# Altium PCB CH32V003F4P6_Dev_Kit_DIY_V1.0.PcbDoc
Units mil, origin at the board's own origin, x right, y up, seen from the top; angles counter-clockwise.
Board outline 1371.87 x 1190 mil, 2 copper layers (Top Layer, Bottom Layer), stack 22.441 mil thick; 16 components, 24 nets, 75 pads, 45 vias.
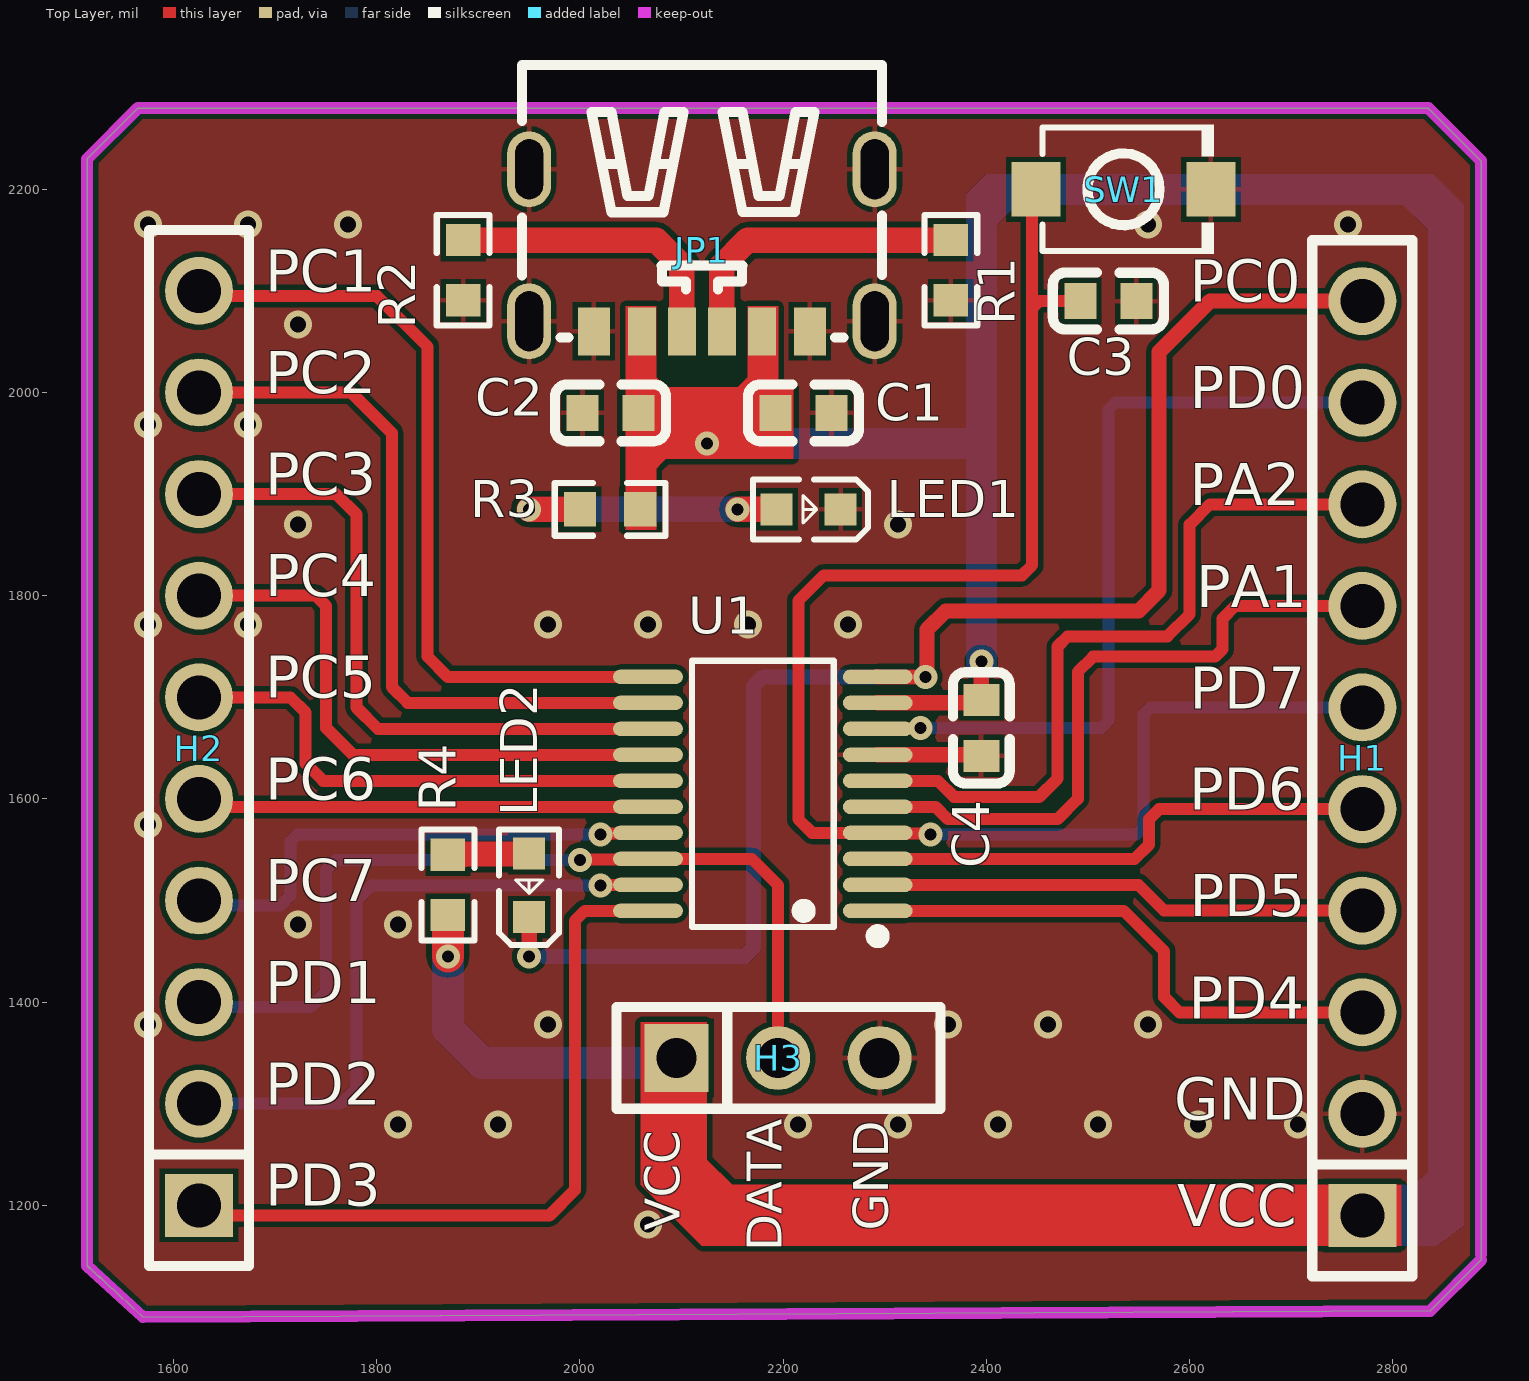
[diagram p0: Top Layer view]
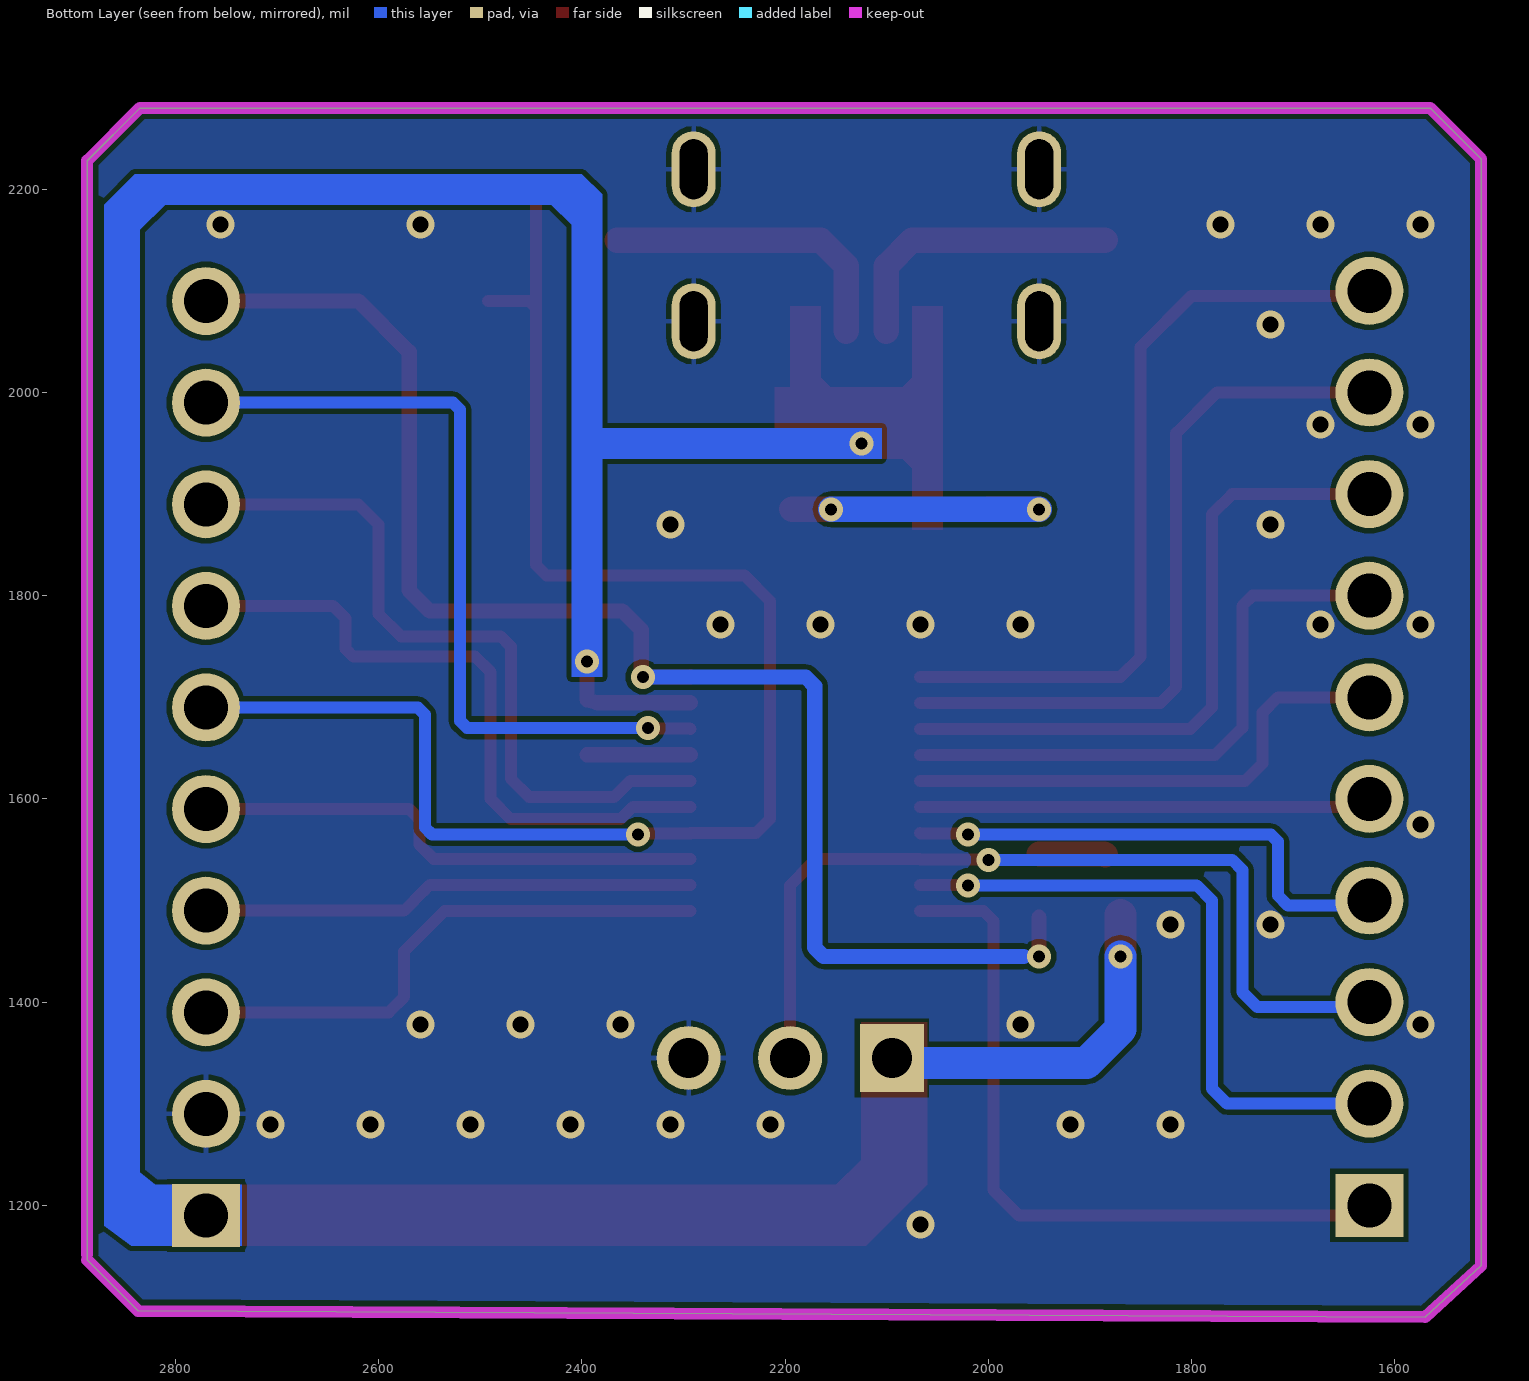
[diagram p1: Bottom Layer view, seen from below]
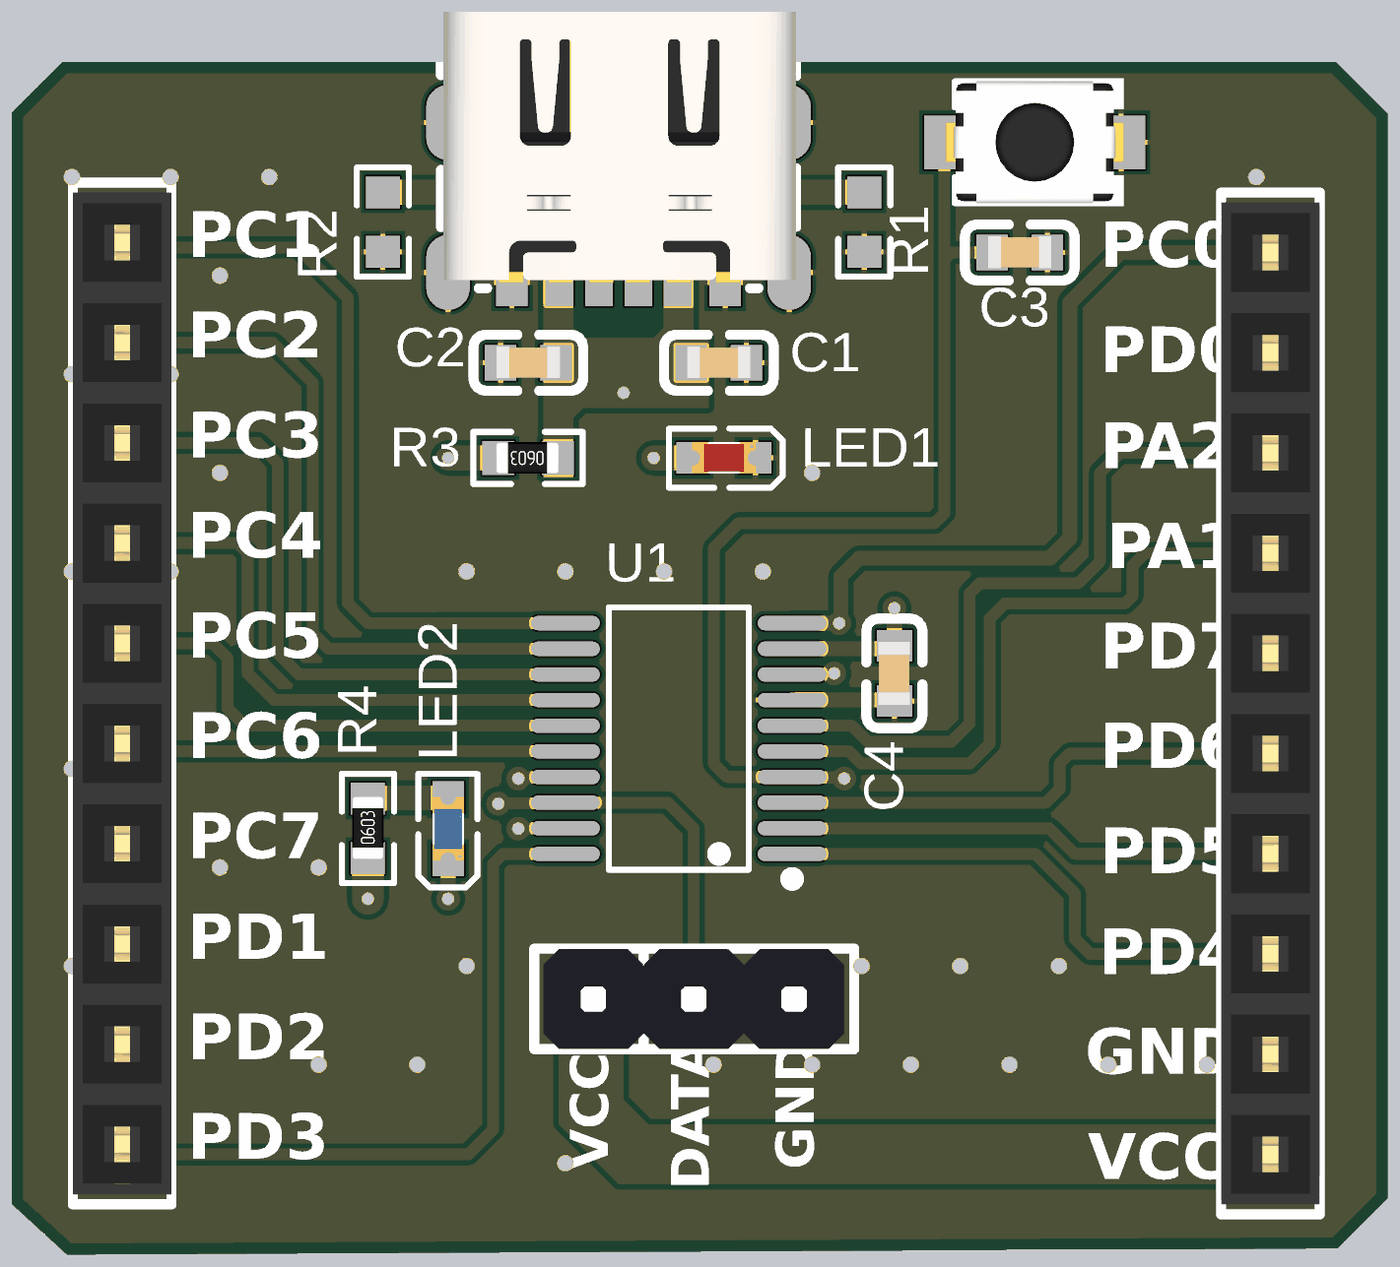
[diagram p2: 3D render of the assembled board from above, using the file's embedded part models]

## Layer stack, top to bottom
Top Solder: solder mask 0.5, Solder Resist, Dk 3.8
Top Layer: signal copper 1.378
Dielectric 1: core 19.685, FR-4, Dk 4.5
Bottom Layer: signal copper 1.378
Bottom Solder: solder mask 0.5, Solder Resist, Dk 3.8

## Board outline
1515,1140.45 1515,2230 1565,2280 2835,2280 2886.87,2228.13 2886.87,1146.19 2836.87,1096.19 1570,1090

## Design rules (kind name [scope] priority, off if disabled: settings)
BoardOutlineClearance [All] p1: gap=7.87 ignorepadtopadclearanceinfootprint=FALSE
Clearance [All] p1: gap=5 ignorepadtopadclearanceinfootprint=FALSE except(9.84: Arc-Hole Track-Hole SMDPad-Hole THPad-Hole Via-Hole Fill-Hole Poly-Hole Region-Hole Text-Hole)
ComponentClearance [All] p1: gap=5 collisioncheckmode=3 verticalgap=5 showdistances=TRUE
DiffPairsRouting [All] p1: maxlimit=10 minlimit=5 mostfreqgap=5 toplayer_minwidth=5 toplayer_maxwidth=1000 toplayer_prefwidth=5 bottomlayer_minwidth=5 bottomlayer_maxwidth=1000 bottomlayer_prefwidth=5 maxuncoupledlength=500
Height [All] p1: minheight=0 maxheight=71497.94 prefheight=500
HoleSize [All] p1: absolutevalues=TRUE maxlimit=248.03 minlimit=11.81 maxpercent=80.000 minpercent=20.000
HoleToHoleClearance [All] p1: gap=9.84 allowstackedmicrovias=FALSE
MinimumAnnularRing [All] p1: minimumring=3
MinimumSolderMaskSliver [All] p1: minsoldermaskwidth=0
PlaneClearance [All] p1: clearance=5
PlaneConnect PlaneConnectPowerPads [InPadClass('PowerPads')] p1: planeconnectstyle=Direct reliefexpansion=20 reliefentries=4 reliefconductorwidth=10 reliefairgap=10
PlaneConnect [All] p2: pad.planeconnectstyle=Relief pad.reliefexpansion=11.81 pad.reliefentries=4 pad.reliefconductorwidth=5 pad.reliefairgap=5 via.planeconnectstyle=Direct via.reliefexpansion=11.81 via.reliefentries=4 via.reliefconductorwidth=5 via.reliefairgap=5
PolygonConnect PolygonConnectPowerPads [All vs (InPadClass('PowerPads'))] p1: connectstyle=Direct reliefconductorwidth=10 reliefentries=4 polygonreliefangle="90 Angle" airgapwidth=10
PolygonConnect [All] p2: thpad.connectstyle=Relief thpad.reliefconductorwidth=5 thpad.reliefentries=4 thpad.polygonreliefangle="90 Angle" thpad.airgapwidth=5 smdpad.connectstyle=Relief smdpad.reliefconductorwidth=5 smdpad.reliefentries=4 smdpad.polygonreliefangle="90 Angle" smdpad.airgapwidth=5 via.connectstyle=Direct via.reliefconductorwidth=5 via.reliefentries=4 via.polygonreliefangle="90 Angle" via.airgapwidth=5
RoutingVias [All] p1: holewidth=11.81 width=23.62 viastyle="Through Hole" minholewidth=11.81 minwidth=23.62 maxholewidth=23.62 maxwidth=259.84
SilkToSilkClearance [All] p1: silktosilkclearance=0
SilkToSolderMaskClearance [IsPad] p1: minsilkscreentomaskgap=5 clearancetoexposedcopper=TRUE
SolderMaskExpansion [All] p1: expansion=2.95 istentingtop=FALSE
Width [All] p1: maxlimit=1000 minlimit=5 preferedwidth=5 minimp=50.000000 maximp=50.000000 favimp=50.000000
20 further rules are at their usual default settings.

## Components (designator, comment, footprint, x,y, rotation, side; value= is the part's Value field where it differs from the comment)
C1 "10uF" C0603 2220,1980 r0 top
C2 "10uF" C0603 2030,1980 r0 top
C3 "10uF" C0603 2520,2090 r0 top
C4 "10uF" C0603 2395,1670 r90 top
H1 "10P 2.54mm Female Header" "10P, 2,54mm, FEMALE HEADER" 2770,1640 r90 top
H2 "10P 2.54mm Female Header" "10P, 2,54mm, FEMALE HEADER" 1625,1650 r90 top
H3 "3P_2.54mm_Male_Header" 3P_2.54mm_Male_Header 2095,1345 r90 top
JP1 "TYPE_C_6P" TYPE_C_6P 2120,2140 r180 top
LED1 "Red" LED0603_RED 2225,1885 r0 top
LED2 "Blue" LED0603_BLUE 1950,1515 r270 top
R1 "5.1K" "R0603 - NC" 2391.01,2065.81 r90 top
R2 "5.1K" "R0603 - NC" 1911.01,2065.81 r90 top
R3 "330Ω" R0603 2084.19,1911.01 r180 top
R4 "330Ω" R0603 1896.01,1460.81 r90 top
SW1 "SMD 3mm×4mm" "ROUND_BUTTON_SMD 3*4mm" 2535,2200 r0 top
U1 "CH32V003F4P6" TSSOP-20 2180,1605 r90 top

## Footprints (in the part's own frame and the unit in brackets; to place one, negate y for a bottom-side part, rotate by r counter-clockwise, add the part's x,y. Pads: shape width x height; smd on the part's side, far side on the other; paste and mask are expansions set on the pad)
3P_2.54mm_Male_Header [mm]
  rect 1.7x1.6 hole 1 paste-2539.97 mask+0.051: 1(0,0)
  round 1.6 hole 1 paste-2539.97 mask+0.051: 2(0,-2.54) 3(0,-5.08)
  silkscreen extent -1.27,-6.6 1.28,1.5, body extent -1.27,-6.35 1.27,1.27, height 8.34
"10P, 2,54mm, FEMALE HEADER" [mm]
  rect 1.575x1.7 hole 1.1 paste-2539.97 mask+0.051: 1(-11.43,0)
  round 1.7 hole 1.1 paste-2539.97 mask+0.051: 2(-8.89,0) 3(-6.35,0) 4(-3.81,0) 5(-1.27,0) 6(1.27,0) 7(3.81,0) 8(6.35,0) 9(8.89,0) 10(11.43,0)
  silkscreen extent -12.95,-1.25 12.95,1.25, body extent -12.7,-1.25 12.7,1.25, height 8.5
C0603 [mm]
  rect 0.8x0.9 smd paste+0 mask+0.051: 1(-0.7,0) 2(0.7,0)
  silkscreen extent -1.39,-0.71 1.39,0.71, body extent -0.8,-0.39 0.8,0.41, height 0.8
LED0603_BLUE [mm]
  rect 0.8x0.8 smd paste+0 mask+0.051: 1(-0.799,0) 2(0.799,0)
  silkscreen extent -1.39,-0.76 1.49,0.75, body extent -0.8,-0.4 0.8,0.4, height 0.6
LED0603_RED [mm]
  rect 0.8x0.8 smd paste+0 mask+0.051: 1(-0.799,0) 2(0.799,0)
  silkscreen extent -1.39,-0.76 1.49,0.75, body extent -0.8,-0.4 0.8,0.4, height 0.6
R0603 [mil]
  rect 31.75x34.02 smd paste+0 mask+2: 1(24.88,26.01) 2(84.19,26.01)
  silkscreen extent 0,0 109,52, body extent 24,10 86,42, height 18
"R0603 - NC" [mil]
  rect 31.75x34.02 smd paste+0 mask+2: 1(24.88,26.01) 2(84.19,26.01)
  silkscreen extent 0,0 109,52
"ROUND_BUTTON_SMD 3*4mm" [mm]
  rect 1.23x1.36 smd paste+0 mask+0.051: 1(-2.185,0) 2(2.185,0)
  silkscreen extent -2.03,-1.62 2.25,1.62, body extent -2.25,-1.55 2.25,1.55, height 2.05
TSSOP-20 [mm]
  oval 0.364x1.742 smd paste+0 mask+0.051: 1(-2.925,-2.871) 2(-2.275,-2.871) 3(-1.625,-2.871) 4(-0.975,-2.871) 5(-0.325,-2.871) 6(0.325,-2.871) 7(0.975,-2.871) 8(1.625,-2.871) 9(2.275,-2.871) 10(2.925,-2.871) 11(2.925,2.871) 12(2.275,2.871) 13(1.625,2.871) 14(0.975,2.871) 15(0.325,2.871) 16(-0.325,2.871) 17(-0.975,2.871) 18(-1.625,2.871) 19(-2.275,2.871) 20(-2.925,2.871)
  silkscreen extent -3.71,-3.02 3.33,1.77, body extent -3.23,-3.25 3.27,3.17, height 1.29
TYPE_C_6P [mm]
  oval 1.1x1.9 hole 0.7 slot 1.5 at 90 deg paste-2539.97 mask+0.051: 7(-4.32,-2.025) 7(-4.32,1.775) 7(4.32,-2.025) 7(4.32,1.775)
  rect 0.7x1.2 smd mask+0.051: A5(-0.5,2.025) A9(1.5,2.025) B5(0.5,2.025) B9(-1.5,2.025)
  rect 0.8x1.2 smd mask+0.051: A12(2.7,2.025) B12(-2.7,2.025)
  silkscreen extent -4.5,-4.63 4.5,2.17, body extent -4.5,-4.84 4.44,2.03, height 3.26

## Part data
C1 C2 C3 C4: library part C0603_MLCC_10uF_X5R_25V, "25V 10uF X5R ±20% 0603 Multilayer Ceramic Capacitors MLCC - SMD/SMT ROHS", LCSC Part=C596327, Manufacturer=YAGEO, Mfr. Part=CC0603MRX5R8BB106, Package=0603, Temperature Coefficient="X5R, 25V", Tolerance=±20%, Voltage Rating=25V, Capacitance=10uF, Link=https://www.lcsc.com/product-detail/C596327.html
H1 H2: "2.54mm 1 8P Through Hole 1x8P Through Hole,P=2.54mm Female Headers ROHS", LCSC Part=C5116489, Manufacturer=ZHOURI, Mfr. Part=PM2.54-1*10, Package="Through Hole,P=2.54mm", Holes Structure=1x10P, Link=https://www.lcsc.com/product-detail/C5116489.html, Pitch=2.54mm
H3: "250V 3A Through Hole Pin Header 2.5mm 3P 6mm -40℃~+105℃ 3mm 2.54mm 1 Black 1x3P Through Hole,P=2.54mm Pin Headers ROHS", Current Rating=3A, LCSC Part=C2937625, Manufacturer=XFCN, Mfr. Part=PZ254V-11-03P, Package="Through Hole,P=2.54mm", Voltage Rating (Max)=250V, Link=https://www.lcsc.com/product-detail/C2937625.html, Number of Pins=3P
JP1: "3A USB 3.1 1 Surface Mount, Right Angle 6P Female -40℃~+85℃ Type-C SMD USB Connectors ROHS", Current Rating-Power=3A, LCSC Part=C456012, Manufacturer="SHOU HAN", Mfr. Part="TYPE-C 6P", Package=SMD, Voltage Rating=5V, Key Attributes="CONN RCPT USB 3.1 Type-C 6POS SMD R/A", Link=https://www.lcsc.com/product-detail/C456012.html?s_z=n_typec%25206p, Number of Contacts=6P, Protocol Standard="USB 3.1"
LED1: library part LED0603_Red, "20mA 230mcd Water Clear -40℃~+85℃ 630nm Red 120° 75mW 1.95V 0603 LED Indication - Discrete ROHS", Forward Current=20mA, LCSC Part=C5875723, Manufacturer=Kingbright, Mfr. Part=APT1608SURCK, Operating Temperature=-40℃~+85℃, Package=0603, Power(Watts)=75mW, Voltage - Forward(Vf)=1.95V, Illumination Color=Red, Key Attributes="1.6 x 0.8 mm SMD Chip LED Lamp", Link=https://www.lcsc.com/product-detail/C5875723.html
LED2: library part LED0603_Blue, "2mA 24mcd Water Clear -40℃~+85℃ 470nm Blue 130° 120mW 2.65V 0603 LED Indication - Discrete ROHS", Forward Current=2mA, LCSC Part=C5200747, Manufacturer=Kingbright, Mfr. Part=APT1608LVBC/D, Operating Temperature=-40℃~+85℃, Package=0603, Power(Watts)=120mW, Voltage - Forward(Vf)=2.65V, Illumination Color=Blue, Key Attributes="1.6 x 0.8 mm SMD Chip LED Lamp", Link=https://www.lcsc.com/product-detail/C5200747.html
R1 R2: library part R0603_NC, Package=0603, Status=NC
R3 R4: library part R0603_330Ω_±1%, "100mW Thick Film Resistor 75V ±100ppm/℃ ±1% 330Ω 0603 Chip Resistor - Surface Mount ROHS", LCSC Part=C105881, Manufacturer=YAGEO, Mfr. Part=RC0603FR-07330RL, Operating Temperature=-55℃~+155℃, Package=0603, Tolerance=±1%, Link=https://www.lcsc.com/product-detail/C105881.html, Resistance=330Ω
SW1: library part SW_BUTTON_SMD_3mm×4mm, "Without Bracket 50mA 4mm 100,000 Cycles 12V 1.6N 3mm 2mm Round Button Surface Mount,Vertical SPST SMD Tactile Switches ROHS", LCSC Part=C720477, Manufacturer=XUNPU, Mfr. Part=TS-1088-AR02016, Operating Temperature=-30℃~+80℃, Package=SMD, Voltage Rating=12V, Length=4mm, Link=https://www.lcsc.com/product-detail/C720477.html?s_z=n_Button, Width=3mm
U1: library part CH32V003F4P6_TSSOP-20-175mil, "TSSOP-20-175mil Microcontrollers (MCU/MPU/SOC) ROHS", LCSC Part=C5187096, Manufacturer=WCH, Package=TSSOP-20-175mil, Link=https://www.lcsc.com/product-detail/C5187096.html?s_z=n_CH32V003F4P6, Mfr. Part=CH32V003F4P6

## Via types
v1: diameter 27.56, hole 15.75, Top Layer to Bottom Layer, tented both sides, 33 vias
v2: diameter 23.62, hole 11.81, Top Layer to Bottom Layer, tented both sides, 12 vias

## Nets (pads, with @x,y where several pads share a name; then routed paths per layer and width w, separated by ;. In a path a pad name is that pad's centre, name@x,y a point inside that pad or via, vN(x,y) a via of type N, cw(c..) or ccw(c..) an arc to the next point about the centre after c; other vN are vias at no path point)
GND: C1.2 C2.1 C3.2 C4.1 H1.2 H3.3 JP1.7 JP1.A12 JP1.B12 LED1.2 R1.1 R2.1 SW1.2 U1.7 | length 102
  Top Layer w15: U1.7 C4.1@2395,1643.39
  other v1: 2066.93,1181.1 1820.87,1279.53 1919.29,1279.53 2214.57,1279.53 2312.99,1279.53 2411.42,1279.53 2509.84,1279.53 2608.27,1279.53 2706.69,1279.53 1574.8,1377.95 1968.5,1377.95 2362.2,1377.95 2460.63,1377.95 2559.06,1377.95 1722.44,1476.38 1820.87,1476.38 1574.8,1574.8 1574.8,1771.65 1673.23,1771.65 1968.5,1771.65 2066.93,1771.65 2165.35,1771.65 2263.78,1771.65 1722.44,1870.08 2312.99,1870.08 1574.8,1968.5 1673.23,1968.5 1722.44,2066.93 1574.8,2165.35 1673.23,2165.35 1771.65,2165.35 2559.06,2165.35 2755.91,2165.35
NetJP1_A5: JP1.A5 R1.2 | length 300.2
  Top Layer w25: JP1.A5 2139.68,2124.68 2165,2150 R1.2
NetJP1_B5: JP1.B5 R2.2 | length 290.2
  Top Layer w25: R2.2 2075,2150 2100.31,2124.69 JP1.B5
NetLED1_1: LED1.1 R3.2 | length 293.5
  Top Layer w25: v2(1950,1885) R3.2 ; v2(2155,1885) LED1.1
  Bottom Layer w25: v2(1950,1885) v2(2155,1885)
NetLED2_1: LED2.1 R4.2 | length 65.3
  Top Layer w25: R4.2@1885,1545 1885.74,1545.74 LED2.1@1950,1545.74
PA1: H1.7 U1.5 | length 659.8
  Top Layer w11.81: U1.5 2349.92,1592.2 2362.13,1580 2470,1580 2490,1600 2490,1725 2505,1740 2625,1740 2632.5,1747.5 2632.5,1777.5 2645,1790 H1.7
PA2: H1.8 U1.6 | length 730.7
  Top Layer w11.81: U1.6 2352.2,1617.8 2368.19,1601.81 2451.81,1601.81 2470,1620 2470,1750 2480,1760 2578.08,1760 2600,1781.92 2600,1870 2620,1890 H1.8
PC0: H1.10 LED2.2 U1.10 | length 1472.5
  Top Layer w15: v2(1950,1445) LED2.2 ; U1.10 2293.11,1720.08 2339.92,1720.08 v2(2340,1720) 2341.65,1721.65 2341.65,1766.65 2360,1785 2550,1785 2570,1805 2570,2040 2620,2090 H1.10
  Bottom Layer w15: 1965,1445 2162.11,1445 2170.9,1453.79 2170.9,1711.21 2179.69,1720 v2(2340,1720)
PC1: H2.10 U1.11 | length 778.1
  Top Layer w11.81: H2.10 1630,2095 1800,2095 1850,2045 1850,1740 1870,1720 1939.69,1720 1939.84,1720.16 U1.11
PC2: H2.9 U1.12 | length 714.9
  Top Layer w11.81: H2.9 1775,2000 1815,1960 1815,1710 1830.43,1694.57 U1.12
PC3: H2.8 U1.13 | length 649
  Top Layer w11.81: H2.8 1760,1900 1780,1880 1780,1690 1801.02,1668.98 U1.13
PC4: H2.7 U1.14 | length 577.1
  Top Layer w11.81: H2.7 1740,1800 1750,1790 1750,1670 1776.61,1643.39 U1.14
PC5: H2.6 U1.15 | length 505.3
  Top Layer w11.81: H2.6 1715,1700 1730,1685 1730,1635 1747.21,1617.8 U1.15
PC6: H2.5 U1.16 | length 445.2
  Top Layer w11.81: H2.5 1632.8,1592.2 U1.16
PC7: H2.4 U1.17 | length 504.8
  Top Layer w11.81: v2(2020,1565) 2021.13,1566.13 2066.49,1566.13 U1.17
  Bottom Layer w11.81: H2.4 1630,1495 1705,1495 1715,1505 1715,1558.08 1721.92,1565 v2(2020,1565)
PD0: H1.9 U1.8 | length 789.3
  Top Layer w11.81: U1.8 2293.51,1669.46 2334.46,1669.46 v2(2335,1670)
  Bottom Layer w11.81: v2(2335,1670) 2513.08,1670 2520,1676.92 2520,1983.08 2526.92,1990 H1.9
PD1: H2.3 H3.2 U1.18 | length 883.6
  Top Layer w11.81: v2(2000,1540) 2000.54,1540.54 2066.49,1540.54 U1.18 2168.98,1541.02 2174.97,1535.03 2195,1515 H3.2
  Bottom Layer w11.81: H2.3 1630,1395 1735,1395 1750,1410 1750,1530 1760,1540 v2(2000,1540)
PD2: H2.2 U1.19 | length 639.6
  Top Layer w11.81: v2(2020,1515) 2020.43,1515.43 U1.19
  Bottom Layer w11.81: H2.2 1765,1300 1780,1315 1780,1500 1795,1515 v2(2020,1515)
PD3: H2.1 U1.20 | length 725.5
  Top Layer w11.81: H2.1 1635,1190 1970,1190 1995,1215 1995,1480 2004.84,1489.84 U1.20
PD4: H1.3 U1.1 | length 544.7
  Top Layer w11.81: U1.1 2535.16,1489.84 2575,1450 2575,1405 2590,1390 H1.3
PD5: H1.4 U1.2 | length 487.5
  Top Layer w11.81: U1.2 2549.57,1515.43 2554.97,1510.03 2575,1490 H1.4
PD6: H1.5 U1.3 | length 511.9
  Top Layer w11.81: U1.3 2546.02,1541.02 2560,1555 2560,1580 2570,1590 H1.5
PD7: C3.1 H1.6 SW1.1 U1.4 | length 1559.4
  Top Layer w11.81: U1.4@2293.03,1566.13 2343.87,1566.13 v2(2345,1565) ; U1.4 2228.39,1566.61 2215,1580 2215,1795 2240,1820 2435,1820 2445,1830 2445,2083.08 ; SW1.1 2445,2196.02 2445,2083.08 ; C3.1 2451.92,2090 2445,2083.08
  Bottom Layer w11.81: v2(2345,1565) 2547.58,1565 2554.5,1571.92 2554.5,1683.08 2561.42,1690 H1.6
VCC: C1.1 C2.2 C4.2 H1.1 H3.1 JP1.A9 JP1.B9 R3.1 R4.1 U1.9 | length 2817.2
  Top Layer w15: C2.2 2116.21,1980 2125,1971.21 v2(2125,1950) ; U1.9 2384.78,1694.57 C4.2 v2(2395,1735)
  Top Layer w31.5: v2(1870,1445) R4.1
  Bottom Layer w15: v2(2125,1950) 2126.11,1951.11 2395,1951.11 ; v2(2395,1735) 2395,1951.11 ; H1.1 2835,1190 2855,1210 2855,2155 2810,2200 2430,2200 2395,2165 2395,1951.11
  Bottom Layer w31.5: v2(1870,1445) 1870,1373.45 1903.45,1340 2090,1340 H3.1

## Polygon pours and split planes (outlines as drawn)
GND on Top Layer "GND_L01_P000" (solid, remove dead copper, pour order 0): 1515,1140.45 1515,2230 1565,2280 2835,2280 2886.87,2228.13 2886.87,1146.19 2836.87,1096.19 1570,1090
GND on Bottom Layer "GND_L02_P001" (solid, remove dead copper, pour order 1): 1515,1140.45 1515,2230 1565,2280 2835,2280 2886.87,2228.13 2886.87,1146.19 2836.87,1096.19 1570,1090

## Keep-outs
Keep-Out Layer:
  lines w11.81: 1515,2219.47 1515,1140.45 1570,1090 2836.87,1096.19 2886.87,1146.19 ; 1515,2220 1515,2230 1565,2280 2835,2280 2886.87,2228.13 2886.87,1151.72

## Other copper
Top Layer:
  region net VCC: 2060,1380 2060,1220 2120,1160 2808.15,1160 2808.15,1220 2150,1220 2125,1245 2125,1380
  region net VCC: 2090,1940 2065,1915 2065,1950
  region net VCC: 2045,1935 2045,1865 2075,1865 2075,1935
  region net VCC: 2140,1990 2165,2015 2170,2010 2170,1975 2165,1970
  region net VCC: 2075,2015 2100,1990 2095,1985 2060,1985 2055,1990
  region net VCC: 2045,2085 2045,1935 2205,1935 2210,1935 2210,2005 2195,2005 2195,2085 2165,2085 2165,2005 2075,2005 2075,2085
Bottom Layer:
  region net VCC: 2735,1160 2843.33,1160 2870,1180 2870,2050 2835,2050 2835,1232.5 2820,1220 2735,1220
  region net VCC: 2390.28,1951.11 2410,1951.11 2410,2165 2430,2185 2810,2185 2835,2160 2835,2050 2870,2050 2870,2185 2840,2215 2400,2215 2380,2195 2380,1951.11
  region net VCC: 2380,1720 2410,1720 2410,1965 2105,1965 2105,1935 2380,1935

## Silkscreen, mask and mechanical layers (free items; w line width, h text height)
Top Overlay:
  text "PC1" at 1690,2085.59 h70.87
  text "PC0" at 2600,2075.59 h70.87
  text "PC2" at 1690,1985.59 h70.87
  text "PD0" at 2600,1970.59 h70.87
  text "PC3" at 1690,1885.59 h70.87
  text "PA2" at 2600.13,1875 h70.87
  text "PC4" at 1690,1785.59 h70.87
  text "PA1" at 2606.76,1775 h70.87
  text "PC5" at 1690,1685.59 h70.87
  text "PD7" at 2600.07,1675 h70.87
  text "PC6" at 1690,1585.59 h70.87
  text "PD6" at 2599.74,1575.59 h70.87
  text "PC7" at 1690,1485.59 h70.87
  text "PD5" at 2599.93,1470.59 h70.87
  text "PD1" at 1690,1385 h70.87
  text "PD4" at 2598.95,1370 h70.87
  text "PD2" at 1690,1285 h70.87
  text "GND" at 2584.91,1270.59 h70.87
  text "PD3" at 1690,1185.59 h70.87
  text "VCC" at 2109.51,1175 h59.06 r90
  text "GND" at 2314.51,1175 h59.06 r90
  text "VCC" at 2587.8,1165.59 h70.87
  text "DATA" at 2210,1155 h59.06 r90